# Altium PCB Плата 0312-239.PcbDoc
Units mm, origin at the board's own origin, x right, y up, seen from the top; angles counter-clockwise.
Board outline 112 x 90 mm, 2 copper layers (Top Layer, Bottom Layer); 95 components, 62 nets, 367 pads, 0 vias.
Unrouted connection lines stored in the file: 191.
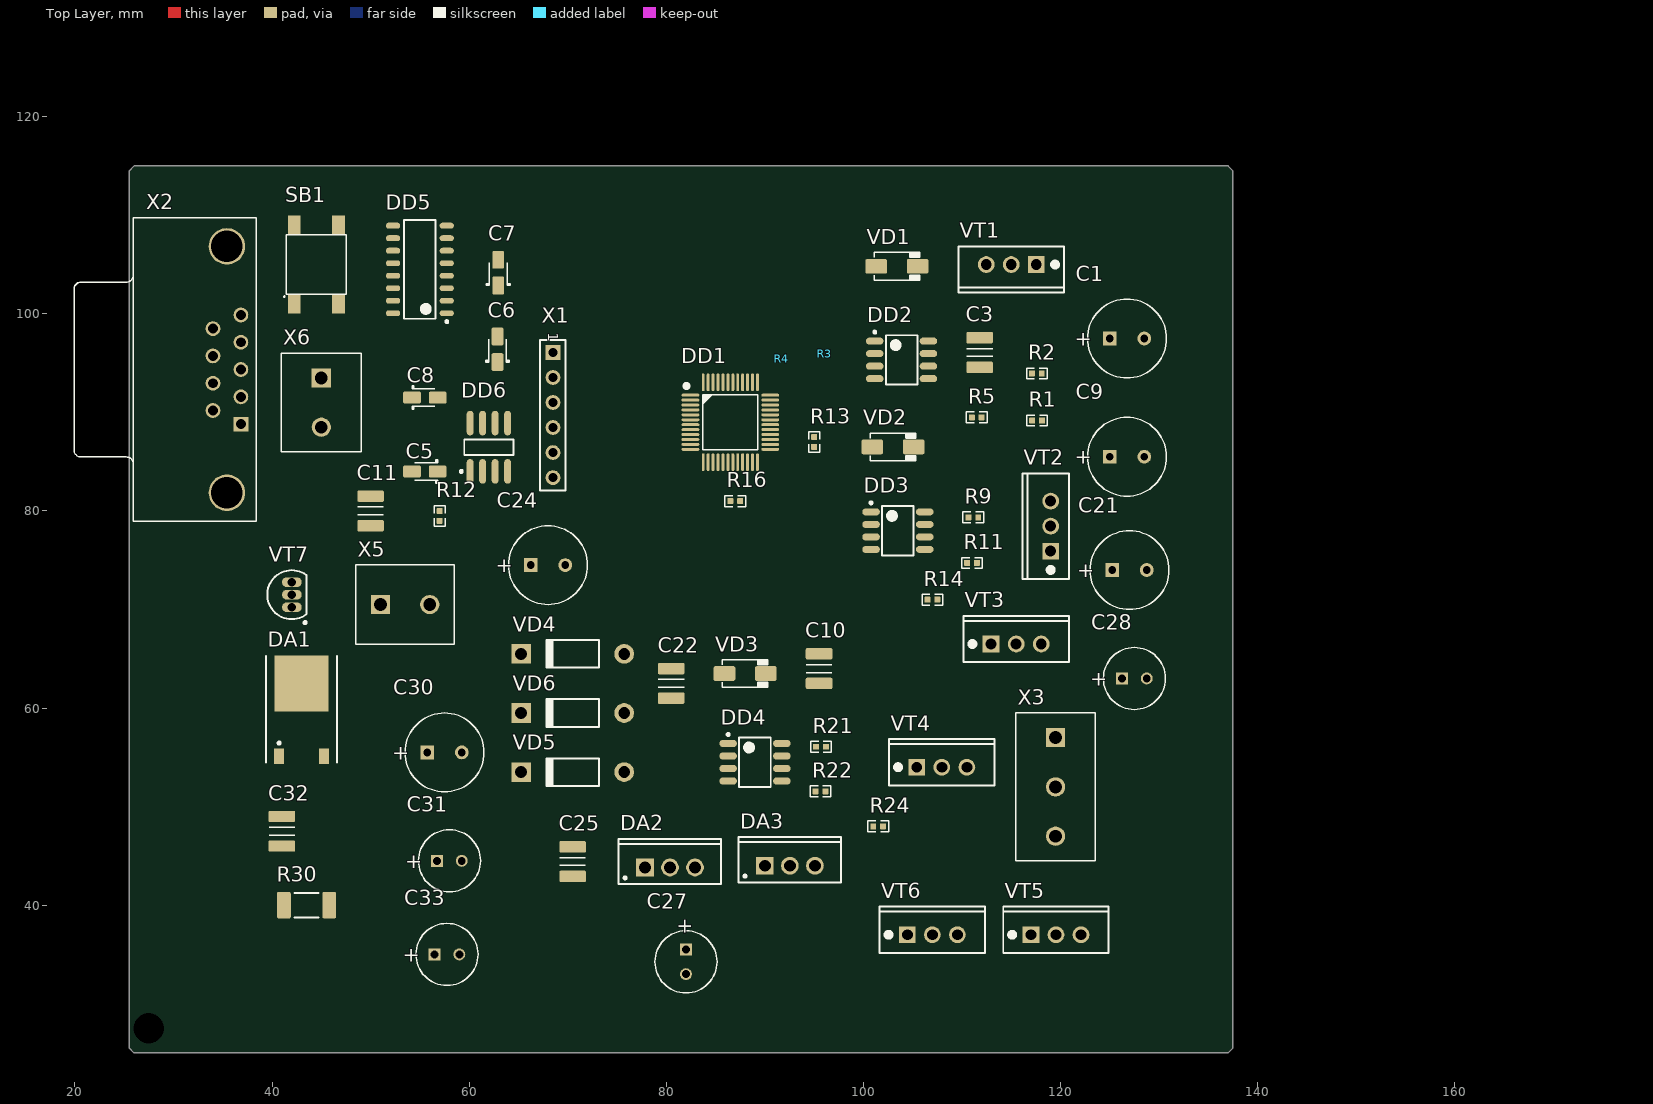
[diagram p0: Top Layer view]
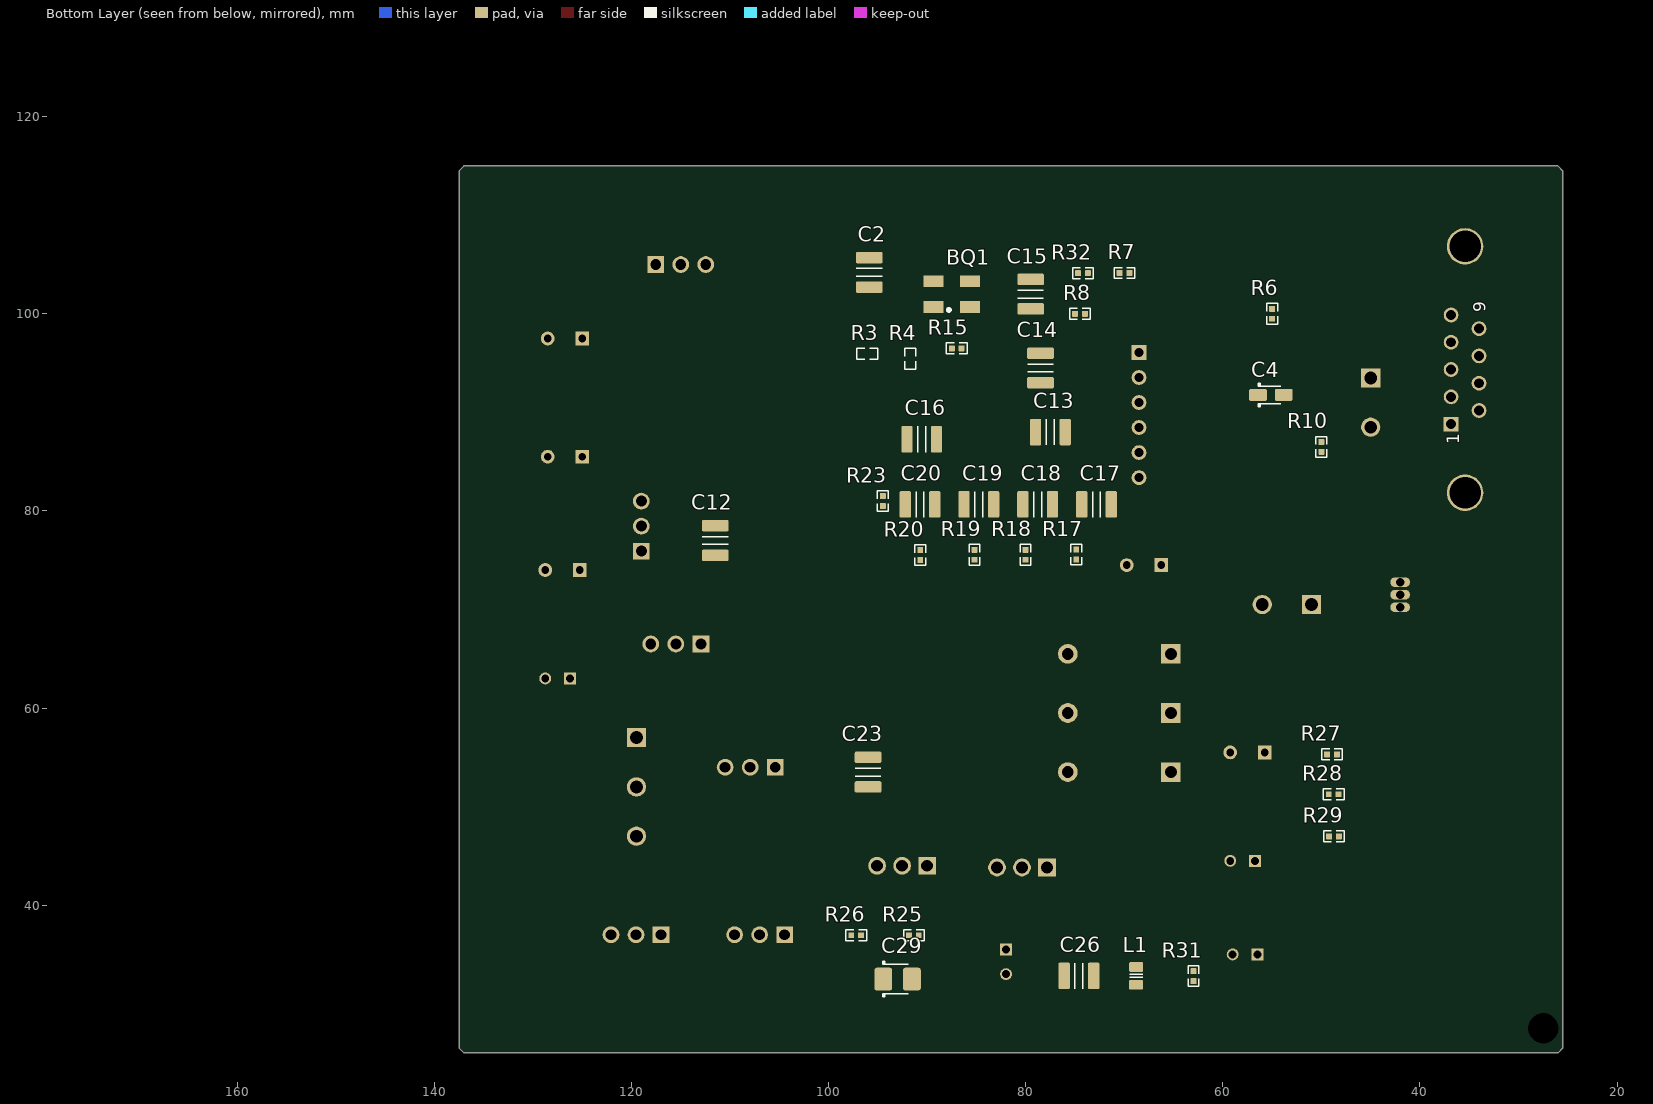
[diagram p1: Bottom Layer view, seen from below]

## Layer stack, top to bottom
Top Solder: solder mask 0.0102, Solder Resist, Dk 3.5
Top Layer: signal copper 0.0356
Dielectric 1: dielectric 0.32, FR-4, Dk 4.8
Bottom Layer: signal copper 0.0356
Bottom Solder: solder mask 0.0102, Solder Resist, Dk 3.5

## Board outline
25.5,25.5 25.5,114.5 26,115 137,115 137.5,114.5 137.5,25.5 137,25 26,25 25.5,25.5

## Design rules (kind name [scope] priority, off if disabled: settings)
Clearance [All] p1: gap=0.254 ignorepadtopadclearanceinfootprint=FALSE except(0: Arc-Hole Track-Hole SMDPad-Hole THPad-Hole Via-Hole Fill-Hole Poly-Hole Region-Hole Text-Hole)
PolygonConnect [All] p1: connectstyle=Relief reliefconductorwidth=0.254 reliefentries=4 polygonreliefangle="90 Angle" airgapwidth=0.254
RoutingVias [All] p1: holewidth=0.711 width=1.27 viastyle="Through Hole" minholewidth=0.711 minwidth=1.27 maxholewidth=0.711 maxwidth=1.27
SolderMaskExpansion [All] p1: expansion=0.102
Width [All] p1: maxlimit=0.254 minlimit=0.254 preferedwidth=0.254
30 further rules are at their usual default settings.

## Components (designator, comment, footprint, x,y, rotation, side; value= is the part's Value field where it differs from the comment)
BQ1 "8МГц" SMD0503_BQ 87.5,102 r180 bottom
C1 "220мк" "WCAP-ATUL 8x11.5x3.5x0.5" 126.75,97.5 r0 top
C2 "0,1мк" CAPC3225X220N 95.875,104.2 r270 bottom
C3 "15мк" CAPC3225X220N 111.8,96.075 r270 top
C4 "1мк" CAPMP3216X180N 55.125,91.775 r180 bottom
C5 "1мк" CAPMP3216X180N 55.5,84 r180 top
C6 "1мк" CAPMP3216X180N 62.875,96.4 r90 top
C7 "1мк" CAPMP3216X180N 62.95,104.175 r90 top
C8 "1мк" CAPMP3216X180N 55.5,91.5 r0 top
C9 "220мк" "WCAP-ATUL 8x11.5x3.5x0.5" 126.75,85.5 r0 top
C10 "0,1мк" CAPC3225X220N 95.5,64 r90 top
C11 "0,1мк" CAPC3225X220N 50,80 r90 top
C12 "15мк" CAPC3225X220N 111.5,77 r270 bottom
C13 "10мк" CAPC3225X220N 77.5,88 r180 bottom
C14 "22" CAPC3225X220N 78.5,94.5 r270 bottom
C15 "22" CAPC3225X220N 79.5,102 r270 bottom
C16 "0,1мк" CAPC3225X220N 90.55,87.275 r180 bottom
C17 "0,1мк" CAPC3225X220N 72.818,80.663 r180 bottom
C18 "0,1мк" CAPC3225X220N 78.787,80.663 r180 bottom
C19 "0,1мк" CAPC3225X220N 84.756,80.663 r180 bottom
C20 "0,1мк" CAPC3225X220N 90.725,80.663 r180 bottom
C21 "220мк" "WCAP-ATUL 8x11.5x3.5x0.5" 127,74 r0 top
C22 "0,1мк" CAPC3225X220N 80.5,62.5 r270 top
C23 "15мк" CAPC3225X220N 96,53.5 r270 bottom
C24 "220мк" "WCAP-ATUL 8x11.5x3.5x0.5" 68,74.5 r0 top
C25 "0,1мк" CAPC3225X220N 70.5,44.425 r270 top
C26 "0,1мк" CAPC3225X220N 74.6,32.825 r180 bottom
C27 "100мк" "WCAP-ATUL 6.3x11x2.5x0.5" 82,34.25 r270 top
C28 "100мк" "WCAP-ATUL 6.3x11x2.5x0.5" 127.5,63 r0 top
C29 "10мк" CAPMP3528X210N 93,32.5 r180 bottom
C30 "100 мк" "WCAP-ATUL 8x11.5x3.5x0.5" 57.5,55.5 r0 top
C31 "100 мк" "WCAP-ATUL 6.3x11x2.5x0.5" 58,44.5 r0 top
C32 "0,01 мк" CAPC3225X220N 41,47.5 r270 top
C33 "330 мк" "WCAP-ATUL 6.3x11x2.5x0.5" 57.75,35 r0 top
DA1 "LM317D2T-TR" 369A-13 43,58.8 r0 top
DA2 "L78S05CV" TO220FP 80.375,43.825 r0 top
DA3 "LM317AT/NOPB" TO220FP 92.54,44 r0 top
DD1 "STM32F103C8T6" LQFP-48_N 86.5,89 r0 top
DD2 "IR2184SPBF" IR2184SPBF 103.875,95.325 r0 top
DD3 "IR2184SPBF" IR2184SPBF 103.5,78 r0 top
DD4 "IR2184SPBF" IR2184SPBF 89,54.5 r0 top
DD5 "MAX232EPE" ST232BDR 55,104.5 r180 top
DD6 "SN75179BD" PCBComponent_1#1 62,86.5 r90 top
L1 "B82432-A1684-K" CAPC2012X135N 68.8,32.825 r90 bottom
R1 "10" RES0402#1 117.625,89.175 r0 top
R2 "10к" RES0402#1 117.6,93.95 r0 top
R3 "100к" RES0402#2 96.075,95.95 r180 top
R4 "100к" RES0402#2 91.7,95.45 r90 top
R5 "10" RES0402#1 111.5,89.5 r0 top
R6 "5,1к" RES0402#1 55,100 r90 bottom
R7 "200к" RES0402#1 69.975,104.15 r180 bottom
R8 "4,7к" RES0402#1 74.5,100 r180 bottom
R9 "10" RES0402#1 111.15,79.35 r0 top
R10 "4,7к" RES0402#1 50,86.5 r270 bottom
R11 "10к" RES0402#1 111.025,74.725 r0 top
R12 "4,7к" RES0402#1 57,79.5 r270 top
R13 "100к" RES0402#1 95,87 r90 top
R14 "10" RES0402#1 107,71 r0 top
R15 "1к" RES0402#1 87,96.5 r180 bottom
R16 "1к" RES0402#1 87,81 r0 top
R17 "4,7к" RES0402#1 74.875,75.575 r90 bottom
R18 "4,7к" RES0402#1 80.025,75.55 r90 bottom
R19 "4,7к" RES0402#1 85.2,75.55 r90 bottom
R20 "4,7к" RES0402#1 90.7,75.525 r90 bottom
R21 "10" RES0402#1 95.7,56.075 r0 top
R22 "10к" RES0402#1 95.65,51.55 r0 top
R23 "100к" RES0402#1 94.5,81 r90 bottom
R24 "10" RES0402#1 101.5,48 r0 top
R25 "240" RES0402#1 91.35,36.95 r180 bottom
R26 "390" RES0402#1 97.2,36.95 r180 bottom
R27 "22" RES0402#1 48.925,55.3 r180 bottom
R28 "240" RES0402#1 48.75,51.25 r180 bottom
R29 "100" RES0402#1 48.725,46.975 r180 bottom
R30 "2к" RES2010 43.5,40 r0 top
R31 "15к" RES0402#1 62.975,32.8 r90 bottom
R32 "200к" RES0402#1 74.2,104.125 r180 bottom
SB1 "SWT-34" SWT-34 44.5,105 r90 top
VD1 "VS-10MQ100-M3/5AT" DO-214AC 103.4,104.825 r0 top
VD2 "VS-10MQ100-M3/5AT" DO-214AC 103,86.5 r0 top
VD3 "VS-10MQ100-M3/5AT" DO-214AC 88,63.5 r0 top
VD4 "1N4007" DO-41 70.5,65.5 r180 top
VD5 "1N4007" DO-41 70.5,53.5 r180 top
VD6 "КД213А" DO-41 70.5,59.5 r180 top
VT1 "IRF1010NPBF" TO-220 115,105 r180 top
VT2 "IRF1010NPBF" TO-220 119,78.46 r90 top
VT3 "IRF1010NPBF" TO-220 115.5,66.5 r0 top
VT4 "IRF1010NPBF" TO-220 107.96,54 r0 top
VT5 "IRF1010NPBF" TO-220 119.54,37 r0 top
VT6 "IRF1010NPBF" TO-220 107,37 r0 top
VT7 "КТ818 (КТ825)" TO-92A 42,71.5 r0 top
X1 "PLS-1x6" PCBComponent_1#2 68.5,91 r270 top
X2 "DRB-9FB" DSUB1.385-2H9 35.42,81.845 r90 top
X3 "301-031-12" 301-031-12_3D 119.5,52 r270 top
X5 "301-021-12" 301-021-12_3D 53.5,70.5 r0 top
X6 "301-021-12" 301-021-12_3D 45,91 r270 top

## Footprints (in the part's own frame and the unit in brackets; to place one, negate y for a bottom-side part, rotate by r counter-clockwise, add the part's x,y. Pads: shape width x height; smd on the part's side, far side on the other; paste and mask are expansions set on the pad)
301-021-12_3D [mm] "Serie 2417 - 5.00 mm _ 2 pins"
  rect 1.95x1.95 hole 1.3: 1(-2.5,0)
  round 1.95 hole 1.3: 2(2.5,0)
  silkscreen extent -5,-4.05 5,4.05, body extent -5,-4.1 5,4, height 10.1
301-031-12_3D [mm] "Serie 2417 - 5.00 mm _ 3 pins"
  rect 1.95x1.95 hole 1.3: 1(-5,0)
  round 1.95 hole 1.3: 2(0,0) 3(5,0)
  silkscreen extent -7.5,-4.05 7.5,4.05, body extent -7.5,-4.05 7.5,4.05, height 10.1
369A-13 [mm] "D-PAK/TO-252-AA; 3 Leads (1 Cropped); Body 10.3 (inc. leads) x 6.7 mm (LxW max)"
  rect 1x1.6 smd: 1(-2.285,-3.7) 3(2.285,-3.7)
  rect 5.5x5.7 smd: 4(0,3.7)
  silkscreen extent -3.6,-4.35 3.6,6.5, body extent -3.37,-4 3.37,6.1, height 2.38
CAPC2012X135N [mm] "Chip Capacitor, Body 2.0x1.2mm, EIA 0805, IPC Medium Density"
  round 0.254 on Mech15: 0(0,0)
  rrect25% 1x1.4 smd: 1(-0.9,0) 2(0.9,0)
  Top Layer pour cut-out: -0.675,0.7 -0.475,0.9 0.475,0.9 0.675,0.7 0.675,-0.7 0.475,-0.9 -0.475,-0.9 -0.675,-0.7
  silkscreen extent -0.15,-0.65 0.15,0.65, body extent -1.1,-0.72 1.1,0.73, height 1.34
CAPC3225X220N [mm] "Chip Capacitor, Body 3.2x2.5mm, EIA 1210, IPC Medium Density"
  round 0.508 on Mech15: 0(0,0)
  rrect25% 1.15x2.7 smd: 1(-1.5,0) 2(1.5,0)
  silkscreen extent -0.4,-1.3 0.4,1.3, body extent -1.8,-1.4 1.8,1.4, height 2.19
CAPMP3216X180N [mm] "Capacitor, polarized, Molded Body, EIA 535BAAC size A; 3.20mm L X 1.60mm W X 1.80mm H"
  round 0.508 on Mech15: 0(0,0)
  rrect25% 1.8x1.2 smd: 1(-1.3,0) 2(1.3,0)
  silkscreen extent -1.3,-1.2 1,1.2, body extent -1.6,-0.8 1.6,0.8, height 1.8
CAPMP3528X210N [mm] "Molded body capacitor, Body 3.5x2.8mm, 1210, IPC Nominal settings"
  round 0.254 on Mech15: 0(0,0)
  rrect25% 1.8x2.3 smd: 1(-1.45,0) 2(1.45,0)
  Top Layer pour cut-out: -0.508,1.27 0.508,1.27 0.508,-1.27 -0.508,-1.27
  silkscreen extent -1.5,-1.8 1.1,1.8, body extent -1.75,-1.4 1.75,1.4, height 2.1
DO-41 [mm] "Diode, Axial; Body 5.2 x 2.7 mm (LxDia. max), Lead Dia. 0.86 mm (max)"
  round 2 hole 1.2: 1(-5.23,0)
  rect 2x2 hole 1.2: 2(5.23,0)
  silkscreen extent -2.65,-1.4 2.75,1.4
DO-214AC [mm] "JEDEC DO214 variation AC. SMA"
  round 0.508 on Mech15: 0(0,0)
  rrect25% 2.2x1.5 smd: 1(-2.1,0) 2(2.1,0)
  silkscreen extent -2.3,-1.4 2.3,1.4, body extent -2.6,-1.3 2.6,1.3, height 2.42
DSUB1.385-2H9 [mm] "Connector; D Subminiature; 9 Position; Right Angle; Pitch 1.385 mm"
  rect 1.5x1.5 hole 1: 1(6.96,-1.42)
  round 1.5 hole 1: 2(9.73,-1.42) 3(12.5,-1.42) 4(15.27,-1.42) 5(18.04,-1.42) 6(8.345,1.42) 7(11.115,1.42) 8(13.885,1.42) 9(16.655,1.42)
  round 3.7 hole 3.2: Z1(25,0) Z2(0,0)
  silkscreen extent -2.9,-3 27.9,15.5, body extent -2.9,-3 27.9,15.5, height 12.51
IR2184SPBF [mm] "SOIC, 8-Leads, Body 4,90x3,90mm, Pitch 1,27mm, IPC Medium Density"
  oval 1.78x0.72 smd: 1(-2.725,1.905) 2(-2.725,0.635) 3(-2.725,-0.635) 4(-2.725,-1.905) 5(2.725,-1.905) 6(2.725,-0.635) 7(2.725,0.635) 8(2.725,1.905)
  silkscreen extent -2.85,-2.5 1.6,2.94, body extent -2,-2.5 2,2.5, height 1.75
LQFP-48_N [mm] "Thin QFP, 48-Leads, Body 7x7mm, Pitch 0.5mm, IPC Medium Density"
  round 1 on Mech15: 0(0,0)
  oval 1.8x0.3 smd: 1(-4.05,2.75) 2(-4.05,2.25) 3(-4.05,1.75) 4(-4.05,1.25) 5(-4.05,0.75) 6(-4.05,0.25) 7(-4.05,-0.25) 8(-4.05,-0.75) 9(-4.05,-1.25) 10(-4.05,-1.75) 11(-4.05,-2.25) 12(-4.05,-2.75) 25(4.05,-2.75) 26(4.05,-2.25) 27(4.05,-1.75) 28(4.05,-1.25) 29(4.05,-0.75) 30(4.05,-0.25) 31(4.05,0.25) 32(4.05,0.75) 33(4.05,1.25) 34(4.05,1.75) 35(4.05,2.25) 36(4.05,2.75)
  oval 0.3x1.8 smd: 13(-2.75,-4.05) 14(-2.25,-4.05) 15(-1.75,-4.05) 16(-1.25,-4.05) 17(-0.75,-4.05) 18(-0.25,-4.05) 19(0.25,-4.05) 20(0.75,-4.05) 21(1.25,-4.05) 22(1.75,-4.05) 23(2.25,-4.05) 24(2.75,-4.05) 37(2.75,4.05) 38(2.25,4.05) 39(1.75,4.05) 40(1.25,4.05) 41(0.75,4.05) 42(0.25,4.05) 43(-0.25,4.05) 44(-0.75,4.05) 45(-1.25,4.05) 46(-1.75,4.05) 47(-2.25,4.05) 48(-2.75,4.05)
  silkscreen extent -4.64,-2.79 2.79,3.88, body extent -4.5,-4.5 4.5,4.5, height 1.59
PCBComponent_1#1 [mm]
  oval 2.5x0.7 smd: 1(-2.487,1.905) 2(-2.487,0.635) 3(-2.487,-0.635) 4(-2.487,-1.905) 5(2.413,-1.905) 6(2.413,-0.635) 7(2.413,0.635) 8(2.413,1.905)
  silkscreen extent -2.61,-2.5 0.76,2.93, body extent -2.04,-2.5 1.96,2.5, height 1.75
PCBComponent_1#2 [mm]
  rect 1.5x1.5 hole 0.9: 1(-5.08,0)
  round 1.5 hole 0.9: 2(-2.54,0) 3(0,0) 4(2.54,0) 5(5.08,0) 6(7.62,0)
  silkscreen extent -6.35,-1.3 8.92,1.27
RES0402#1 [mm] "Chip Resistor, Body 1.0x0.5mm, EIA 0402, IPC Medium Density"
  round 0.2 on Mech15: 0(0,0)
  rrect20% 0.6x0.6 smd: 1(-0.5,0) 2(0.5,0)
  Top Layer pour cut-out: -0.325,0.375 -0.2,0.5 0.2,0.5 0.325,0.375 0.325,-0.375 0.2,-0.5 -0.2,-0.5 -0.325,-0.375
  silkscreen extent -1.05,-0.55 1.05,0.55, body extent -0.52,-0.27 0.53,0.28, height 0.4
RES0402#2 [mm] "Chip Resistor, Body 1.0x0.5mm, EIA 0402, IPC Medium Density"
  round 0.2 on Mech15: 0(0,0)
  rrect20% 0.6x0.6 on Mech1: 1(-0.5,0) 2(0.5,0)
  body extent -0.52,-0.28 0.53,0.27, height 0.4
RES2010 [mm] "Chip Resistor, Body 5.0x2.5mm, 2010, IPC Medium Density"
  round 0.508 on Mech15: 0(0,0)
  rrect25% 1.4x2.7 smd: 1(-2.3,0) 2(2.3,0)
  silkscreen extent -1.2,-1.25 1.2,1.25, body extent -2.6,-1.35 2.6,1.35, height 0.69
SMD0503_BQ [mm]
  rect 2x1.2 smd: 1(-1.85,-1.3) 2(1.85,-1.3) 3(1.85,1.3) 4(-1.85,1.3)
  silkscreen extent -0.45,-1.75 -0.15,-1.45, body extent -2.5,-1.6 2.5,1.6, height 1
ST232BDR [mm]
  oval 1.45x0.6 smd: 1(-2.725,4.445) 2(-2.725,3.175) 3(-2.725,1.905) 4(-2.725,0.635) 5(-2.725,-0.635) 6(-2.725,-1.905) 7(-2.725,-3.175) 8(-2.725,-4.445) 9(2.725,-4.445) 10(2.725,-3.175) 11(2.725,-1.905) 12(2.725,-0.635) 13(2.725,0.635) 14(2.725,1.905) 15(2.725,3.175) 16(2.725,4.445)
  silkscreen extent -2.85,-5 1.6,5.42, body extent -2,-5 2,5, height 2.65
SWT-34 [mm] "6*6mm vertical type, SMD, height 4.3mm, black actuator, 160gf, T&R"
  rect 2x1.3 smd: 1(-3.975,2.25) 2(3.975,2.25) 3(-3.975,-2.25) 4(3.975,-2.25)
  silkscreen extent -3.29,-3.04 3.04,3.29, body extent -4.5,-3.1 4.5,3.1, height 4.29
TO220FP [mm] "TO, Thru-Hole, Vertical, Heatsink Mounted; 3 In-Line Leads; Pitch 2.54 mm"
  rect 1.8x1.8 hole 1.2: 1(-2.54,0)
  round 1.8 hole 1.2: 2(0,0) 3(2.54,0)
  silkscreen extent -5.2,-1.7 5.2,2.9, body extent -5.25,-1.75 5.25,2.95, height 20
TO-92A [mm] "TO, Flat Index; 3 In-Line, Axial Leads; Body Dia. 4.5mm; Leads 0.51 x 0.48 mm (max)"
  oval 2x1 hole 0.9: 1(0,-1.27) 2(0,0) 3(0,1.27)
  silkscreen extent -2.48,-2.95 1.5,2.48, body extent -2.48,-2.5 1.5,2.5, height 6.86
TO-220 [mm] "TO, Thru-Hole, Vertical, Heatsink Mounted; 3 In-Line Leads; Pitch 2.54 mm"
  rect 1.7x1.7 hole 1.1: 1(-2.54,0)
  round 1.7 hole 1.1: 2(0,0) 3(2.54,0)
  silkscreen extent -5.35,-1.85 5.35,2.85
"WCAP-ATUL 6.3x11x2.5x0.5" [mm] "Polarized capacitors, Aluminum Electrolytic Capacitors, 2-Leads, Body 6.3x11x2.5x0.5"
  rect 1.206x1.206 hole 0.8: 1(-1.25,0)
  round 1.206 hole 0.8: 2(1.25,0)
  silkscreen extent -3.15,-3.15 3.15,3.15, body extent -3.12,-3.13 3.14,3.15, height 19.51
"WCAP-ATUL 8x11.5x3.5x0.5" [mm] "Polarized capacitors, Aluminum Electrolytic Capacitors, 2-Leads, Body 8x11.5x3.5x0.5"
  rect 1.4x1.4 hole 0.8: 1(-1.75,0)
  round 1.4 hole 0.8: 2(1.75,0)
  silkscreen extent -4,-4 4,4, body extent -3.97,-3.98 3.99,4, height 11.76

## Part data
BQ1: library part SMD0503, "Кварцевый резонатор", ValueManufacturer=Китай, ValueDescription="Кварцевый резонатор", ValueManufacturerPartNumber=SMD0503, ValueType=SMD0503, ValueValue=8МГц
C1 C4 C5 C6 C7 C8 C9 C21 C24 C27 C28 C29 C30 C31 C33: library part Сapacitor_Pol, "Сapacitor_Pol", ValueDescription="Конденсатор полярный", ValueManufacturerPartNumber="\"\" -", ValueType_TU=Конденсаторы
C2 C3 C10 C11 C12 C13 C14 C15 C16 C17 C18 C19 C20 C22 C23 C25 C26 C32: library part Сapacitor, "Сapacitor", ValueDescription=Конденсатор, ValueManufacturerPartNumber="\"\" -", ValueType_TU=Конденсаторы
DA1: library part MC33269DT-3.3G, "Регулятор с малым падением напряжения, 800мА, 3.3В", ValueDescription="DC-DC регулятор", ValueManufacturer="ON Semiconductor", ValuePackage=369A-13, ValueManufacturerPartNumber=MC33269DT-3.3G, ValueType=MC33269DT-3.3G
DA2 DA3: library part L7805ABV, "Регулятор положительного напряжения, 1.5А, 5В", ValueDescription="Регулятор положительного напряжения", ValueManufacturer="ST Microelectronics", ValueManufacturerPartNumber=L7805ABV, ValueType=L7805ABV
DD1: "ARM Cortex-M3 32-bit MCU, 128 KB Flash, 20 KB Internal RAM, 37 I/Os, 48-pin LQFP, -40 to 85 degC, Tray", I/Os (High Current)=37, Operating Frequency(F) (Processor speed) (MHz)=72, Supplier Part Number 1=1606327, Supply Voltage(Vcc) min (V)=2, ValueManufacturer=STMicroelectronics, A/D Converter="2x12-bit (10 Channel)", ComponentLink1Description="Manufacturer URL", ComponentLink1URL=http://www.st.com/web/en/home.html, ComponentLink2Description=Datasheet, ComponentLink2URL=http://www.st.com/st-web-ui/static/active/en/resource/technical/document/datasheet/CD00161566.pdf, ComponentLink3Description="Package Specification", ComponentLink3URL=http://www.st.com/st-web-ui/static/active/en/resource/technical/document/datasheet/DM00058181.pdf, Core="ARM Cortex-M3", DatasheetVersion="Rev. 16", FLASH Size (Prog) (kB)=64, Internal RAM Size (kB)=20, Mounting Technology="Surface Mount", PackageDescription="48-Pin Low Profile Quad Flat Package, 7 x 7 mm Body, 0.5 mm Pitch", PackageReference=LQFP48, PackageVersion="Rev. 6, 06/2013", Packing=Tray, PartNumber=STM32F103C8T6, Supplier 1=Farnell, Supplier 2=Newark, Supplier 3=Newark, Supplier Part Number 2=11N8296, Supplier Part Number 3=57P1214, ValueManufacturerPartNumber=STM32F103C8T6, ValueType=STM32F103C8T6
DD2 DD3 DD4: library part Component_1
DD5: library part ST232BDR
DD6: "Дифференциальный драйвер и ресивер двухпроводной линии (RS-422)", ValueManufacturer="Texas Instruments", ValuePackage=SO-8, ValueDescription="Дифференциальный драйвер и ресивер двухпроводной линии (RS-422)", ValueManufacturerPartNumber=SN75179BD, ValueType=SN75179BD
L1: library part BLM21AG102SN1, "Дроссель подавления ЭМП", ValueCurrent="0,2 А", ValueManufacturer="Murata Manufacturing", ValuePackage=0805, ValueValue="20 мГн", ValueDescription="Дроссель подавления ЭМП", ValueManufacturerPartNumber=BLM21AG102SN1, ValueType=BLM21AG102SN1
R1 R2 R3 R4 R5 R6 R7 R8 R9 R10 R11 R12 R13 R14 R15 R16 R17 R18 R19 R20 R21 R22 R23 R24 R25 R26 R27 R28 R29 R30 R31 R32: library part Resistor, "Резистор", ValueManufacturerPartNumber="\"\" -", ValueType_TU=Резисторы, ValueDescription=Резистор
SB1: "Тактовый переключатель SMD h=7мм (SDTM-630-N) (TS-06M-CSM)", ValueDescription="Кнопка тактовая", ValueManufacturer=Тайвань, ValueManufacturerPartNumber=SWT-34, ValuePackage=SWT-34, ValueType=SWT-34
VD1 VD2 VD3: "Диод Шоттки 2.1А 100В", ValueCurrent=2,1А, ValueManufacturer="Fairchild Semiconductor", ValueMaxReverseVoltage=100В, ValuePackage=DO-214AC, ValueDescription="Диод Шоттки 2.1А 100В", ValueManufacturerPartNumber=VS-10MQ100-M3/5AT, ValueType=VS-10MQ100-M3/5AT
VD4 VD5 VD6: library part "Diode 1N4007", "1 Amp General Purpose Rectifier", Code_JEDEC=DO-204-AL, ComponentLink1Description="Manufacturer Link", ComponentLink1URL=http://www.fairchildsemi.com/, ComponentLink2Description=Datasheet, ComponentLink2URL=http://www.fairchildsemi.com/ds/1N%2F1N4001.pdf, DatasheetVersion=1998, LatestRevisionDate=17-Jul-2002, LatestRevisionNote="Re-released for DXP Platform.", PackageDescription="Diode, Axial; Body 5.2 x 2.7 mm (LxDia. max), Lead Dia. 0.86 mm (max)", PackageReference=DO-41, PackageVersion=Aug-1999, Published=8-Jun-2000, Publisher="Altium Limited"
VT1 VT2 VT3 VT4 VT5 VT6: library part IRLML0100TRPBF, "Транзистор, Nкан 100В 127А TO220AB", ValueCurrent=127А, ValueManufacturer="International Rectifier", ValueManufacturerPartNumber=IRFB4310PBF, ValuePackage=TO-220, ValueVoltage=100В, ValueDescription="Транзистор, Nкан 100В 127А TO220AB", ValueType=IRFB4310PBF
VT7: library part 2N3906, "PNP General Purpose Amplifier", ComponentLink1Description="Manufacturer Link", ComponentLink1URL=http://www.fairchildsemi.com/, ComponentLink2Description=Datasheet, ComponentLink2URL=http://www.fairchildsemi.com/ds/2N%2F2N3906.pdf, DatasheetVersion=1997, LatestRevisionDate=15-Jan-2003, LatestRevisionNote="PCB Footprint 'BCY-W3/D4.7' replaced", PackageDescription="TO, Flat Index; 3 In-Line, Axial Leads; Body Dia. 4.5mm; Leads 0.51 x 0.48 mm (max)", PackageReference=TO-92A, PackageVersion=Sep-1998, Published=8-Jun-2000, Publisher="Altium Limited"
X1: library part IDC-6MS, A1TXT=V_targ, A2TXT=SWCLK, A3TXT=GND, A4TXT=SWDIO, A5TXT=NRST, A6TXT=SWO, ValueManufacturerPartNumber=IDC-6MS, ValueType=IDC-6MS
X2: "Розетка 9 pin на плату 9.4мм", ValueManufacturer="Ningbo Zhenqin Electronic (Connfly Electronic)", A2TXT=Output, A3TXT=Input, A5TXT=GND, ValueDescription="Розетка 9 pin на плату 9.4мм", ValueManufacturerPartNumber=DRB-9FB, ValueType=DRB-9FB
X3: "Клеммник винтовой, 3-контактный, 5мм, прямой", ValueManufacturer="Ningbo Xinya M&E", A1TXT=PMW_A, A2TXT=PMW_B, A3TXT=PMW_C, ValueDescription="Клеммник винтовой, 3-контактный, 5мм, прямой", ValueManufacturerPartNumber=301-031-12, ValueType=301-031-12
X5 X6: "Клеммник винтовой, 2-контактный, 5мм, прямой", ValueManufacturer="Ningbo Xinya M&E", ValueDescription="Клеммник винтовой, 2-контактный, 5мм, прямой", ValueManufacturerPartNumber=301-021-12, ValueType=301-021-12
  X5: A1TXT=SIGN_A, A2TXT=SIGN_B
  X6: A1TXT=SIGN_Z, A2TXT=SIGN_Y

## Free pads (board coordinates)
  rect 0x0 hole 3.1: ""(27.5,27.5) ""(27.5,125) ""(175,27.5) ""(175,125)

## Nets (pads, with @x,y where several pads share a name; then routed paths per layer and width w, separated by ;. In a path a pad name is that pad's centre, name@x,y a point inside that pad or via, vN(x,y) a via of type N, cw(c..) or ccw(c..) an arc to the next point about the centre after c; other vN are vias at no path point)
+3,3В: C28.1 DA3.3 R25.2
+3.3В: C16.2 C17.1 C18.1 C19.1 C20.1 DD1.1 DD1.24 DD1.36 DD1.48 X1.1
+5В: C4.2 C5.1 C11.2 C26.1 C27.1 C29.1 DA2.3 DA3.1 DD5.16 DD6.1 R8.2 R10.2 R17.2 R18.2 R19.2 R20.2 R32.2
+12В: C1.1 C2.1 C9.1 C10.1 C21.1 C22.1 DA1.4 DD2.1 DD3.1 DD4.1 R28.2 VD1.1 VD2.1 VD3.1 VD4.1 VD5.2 VT1.2 VT3.2 VT5.2
+27В: C30.1 R27.1 VT7.1
BOOT1: DD1.20 R16.2
BOOTO: DD1.44 R15.2
GND: C1.2 C2.2 C5.2 C8.1 C9.2 C10.2 C11.1 C21.2 C22.2 C24.2 C25.2 C26.2 C27.2 C28.2 C29.2 C30.2 C31.2 DA2.2 DD1.8 DD1.23 DD1.35 DD1.47 DD2.4 DD3.4 DD4.4 DD5.15 DD6.4 R3.1 R4.1 R6.1 R12.1 R13.1 R23.1 R26.1 R29.1 VD5.1 VD6.1 VT2.3 VT4.3 VT6.3 X2.5
NetBQ1_1: BQ1.1 C14.1 DD1.5
NetBQ1_3: BQ1.3 C15.1 DD1.6
NetC3_1: C3.1 DD2.8 VD1.2
NetC3_2: C3.2 DD2.6 R2.1 VT1.3 VT2.2 X3.1
NetC4_1: C4.1 DD5.2
NetC6_1: C6.1 DD5.1
NetC6_2: C6.2 DD5.3
NetC7_1: C7.1 DD5.4
NetC7_2: C7.2 DD5.5
NetC8_2: C8.2 DD5.6
NetC12_1: C12.1 DD3.8 VD2.2
NetC12_2: C12.2 DD3.6 R11.1 VT3.3 VT4.2 X3.2
NetC16_1: C16.1 DD1.9
NetC23_1: C23.1 DD4.8 VD3.2
NetC23_2: C23.2 DD4.6 R22.1 VT5.3 VT6.2 X3.3
NetC24_1: C24.1 C25.1 DA2.1 VD4.2
NetC31_1: C31.1 L1.2
NetC32_1: C32.1 DA1.1 R28.1 R30.2
NetC32_2: C32.2 C33.2 R29.2 R30.1 R31.1
NetC33_1: C33.1 L1.1 R31.2 VD6.2 VT7.3
NetDA1_3: DA1.3 R27.2 VT7.2
NetDA3_2: DA3.2 R25.1 R26.2
NetDD2_5: DD2.5 R5.1
NetDD2_7: DD2.7 R1.1
NetDD3_5: DD3.5 R14.1
NetDD3_7: DD3.7 R9.1
NetDD4_5: DD4.5 R24.1
NetDD4_7: DD4.7 R21.1
NetDD5_13: DD5.13 R6.2 X2.3
NetDD5_14: DD5.14 X2.2
NetDD6_5: DD6.5 X6.2
NetDD6_6: DD6.6 X6.1
NetDD6_7: DD6.7 R12.2 X5.2
NetDD6_8: DD6.8 R10.1 X5.1
NetR1_2: R1.2 R2.2 VT1.1
NetR5_2: R5.2 VT2.1
NetR7_2: R7.2 R32.1
NetR9_2: R9.2 R11.2 VT3.1
NetR14_2: R14.2 VT4.1
NetR19_1: R19.1 X1.5
NetR21_2: R21.2 R22.2 VT5.1
NetR24_2: R24.2 VT6.1
NRST: C13.1 DD1.7 R8.1 SB1.3 SB1.4
PWM_A: DD1.29 DD2.2 R4.2
PWM_B: DD1.30 DD3.2 R13.2
PWM_C: DD1.31 DD4.2 R23.2
PWM_nSD: DD1.32 DD2.3 DD3.3 DD4.3 R3.2
SWCLK: DD1.37 R17.1 X1.2
SWDIO: DD1.34 R18.1 X1.4
SWO: DD1.39 R20.1 X1.6
USART1_RX: DD1.22 DD6.2
USART1_TX: DD1.21 DD6.3
USART2_RX: DD1.46 DD5.12
USART2_TX: DD1.45 DD5.11 R7.1
pads on no net: BQ1.2 BQ1.4 C2.0 C3.0 C4.0 C5.0 C6.0 C7.0 C8.0 C10.0 C11.0 C12.0 C13.0 C13.2 C14.0 C14.2 C15.0 C15.2 C16.0 C17.0 C17.2 C18.0 C18.2 C19.0 C19.2 C20.0 C20.2 C22.0 C23.0 C25.0 C26.0 C29.0 C32.0 DD1.0 DD1.2 DD1.3 DD1.4 DD1.10 DD1.11 DD1.12 DD1.13 DD1.14 DD1.15 DD1.16 DD1.17 DD1.18 DD1.19 DD1.25 DD1.26 DD1.27 DD1.28 DD1.33 DD1.38 DD1.40 DD1.41 DD1.42 DD1.43 DD5.7 DD5.8 DD5.9 DD5.10 L1.0 R1.0 R2.0 R3.0 R4.0 R5.0 R6.0 R7.0 R8.0 R9.0 R10.0 R11.0 R12.0 R13.0 R14.0 R15.0 R15.1 R16.0 R16.1 R17.0 R18.0 R19.0 R20.0 R21.0 R22.0 R23.0 R24.0 R25.0 R26.0 R27.0 R28.0 R29.0 R30.0 R31.0 R32.0 SB1.1 SB1.2 VD1.0 VD2.0 VD3.0 X1.3 X2.1 X2.4 X2.6 X2.7 X2.8 X2.9 X2.Z1 X2.Z2

## Silkscreen, mask and mechanical layers (free items; w line width, h text height)
Mechanical 1:
  lines w1.2: 25.5,25.5 26,25 137,25 137.5,25.5 137.5,114.5 137,115 26,115 25.5,114.5 25.5,25.5 ; 25.5,25.5 25.5,25.5

## Text inside footprints (layer, text, board x,y; h text height)
C1: Top Overlay "+" at 121.425,96.763 h1.5
C9: Top Overlay "+" at 121.425,84.763 h1.5
C21: Top Overlay "+" at 121.675,73.263 h1.5
C24: Top Overlay "+" at 62.675,73.763 h1.5
C27: Top Overlay "+" at 81.263,38.725 h1.5 r270
C28: Top Overlay "+" at 123.025,62.263 h1.5
C30: Top Overlay "+" at 52.175,54.763 h1.5
C31: Top Overlay "+" at 53.525,43.763 h1.5
C33: Top Overlay "+" at 53.275,34.263 h1.5
X1: Top Overlay "1" at 68,98.08 h1 r270
X2: Bottom Overlay "1" at 36.02,86.745 h1.27 r270; Bottom Overlay "9" at 33.32,100.145 h1.27 r270